# Altium PCB PCB.PcbDoc
Units mm, origin at the board's own origin, x right, y up, seen from the top; angles counter-clockwise.
Board outline 47.88 x 20.83 mm, 2 copper layers (Top Layer, Bottom Layer); 23 components, 11 nets, 65 pads, 4 vias.
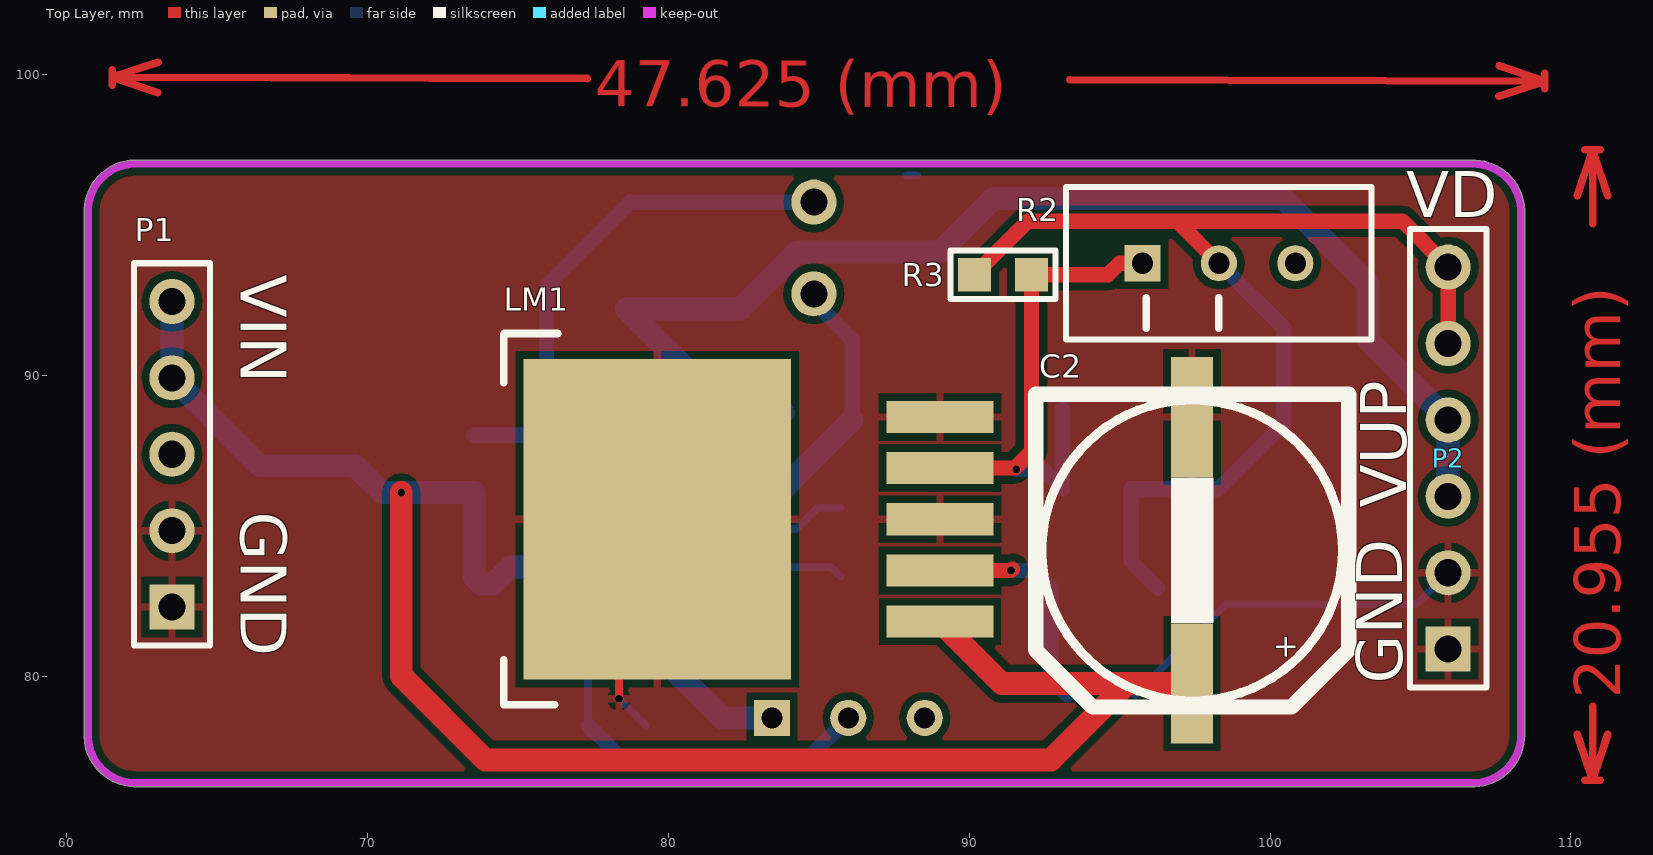
[diagram p0: Top Layer view]
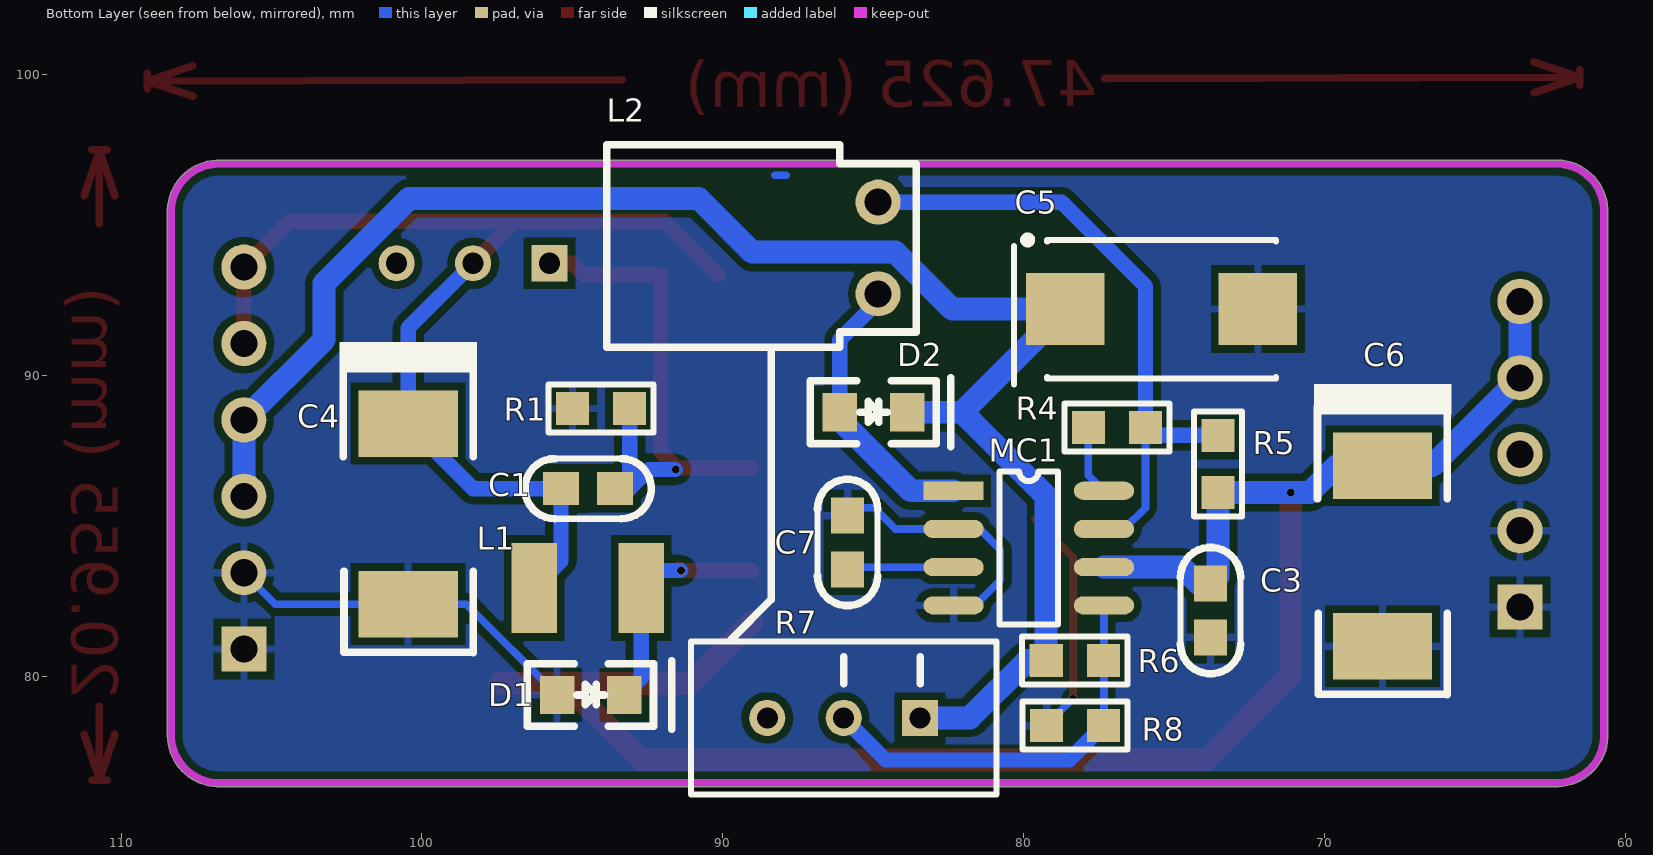
[diagram p1: Bottom Layer view, seen from below]

## Layer stack, top to bottom
Top Layer: signal copper 0.0356
Dielectric: dielectric 0.32, FR-4, Dk 4.8
Bottom Layer: signal copper 0.0356

## Board outline
60.579,77.978 60.579,95.374 cw(c62.293,95.441) 62.225,97.155 cw(c62.23,97.028) 62.23,97.155 106.677,97.155 cw(c106.743,95.441) 108.458,95.509 cw(c108.331,95.504) 108.458,95.504 108.458,78.108 cw(c106.743,78.041) 108.46,78.041 cw(c106.743,78.041) 106.812,76.327 cw(c106.807,76.454) 106.807,76.327 62.36,76.327 cw(c62.293,78.041) 60.579,77.973 cw(c60.706,77.978)

## Design rules (kind name [scope] priority, off if disabled: settings)
Clearance [All] p1: gap=0.254
PolygonConnect [All] p1: connectstyle=Relief reliefconductorwidth=0.254 reliefentries=4 polygonreliefangle="90 Angle" airgapwidth=0.254
RoutingVias [All] p1: holewidth=0.711 width=1.27 viastyle="Through Hole" minholewidth=0.711 minwidth=1.27 maxholewidth=0.711 maxwidth=1.27
SolderMaskExpansion [All] p1: expansion=0.102
Width [All] p1: maxlimit=1.27 minlimit=0.254 preferedwidth=0.254 minimp=50.000000 maximp=50.000000 favimp=50.000000
28 further rules are at their usual default settings.

## Components (designator, comment, footprint, x,y, rotation, side; value= is the part's Value field where it differs from the comment)
C1 "Cap" CAP-MLCC-0603 95.377,86.233 r0 bottom
C2 "Cap Pol3" SMD-EC-F10 97.409,79.756 r90 top
C3 "Cap" CAP-MLCC-0603 73.787,81.28 r270 bottom
C4 "Cap Pol3" 6032C 100.457,88.392 r90 bottom
C5 "Cap Pol" CAP-TAN-7343/CAPD 78.613,92.202 r180 bottom
C6 "Cap Pol" 6032C 68.072,86.995 r90 bottom
C7 "Cap" CAP-MLCC-0603 85.852,85.344 r90 bottom
D1 "1N5819" 0805D 95.504,79.375 r180 bottom
D2 "1N5819" 0805D 86.106,88.773 r180 bottom
L1 "Inductor" SMDL52 94.615,82.931 r0 bottom
L2 "Inductor" "HEADER2 PZ" 84.709,94.234 r90 bottom
LM1 "LM2596" TO-263-5 84.328,85.217 r90 top
MC1 "MC34063" LT1963-SOP8 81.661,78.105 r180 bottom
P1 "Header 5" HDR1X5 63.5,82.296 r90 top
P2 "Header 6" HDR1X6 105.918,80.899 r90 top
R1 "Res1" RES-0603 94.996,88.9 r0 bottom
R2 "RPot" VR5 98.298,93.726 r0 top
R3 "Res1" RES-0603 90.17,93.345 r180 top
R4 "Res1" RES-0603 75.946,88.265 r180 bottom
R5 "Res1" RES-0603 73.533,86.106 r270 bottom
R6 "Res1" RES-0603 79.248,80.518 r0 bottom
R7 "RPot" VR5 85.979,78.613 r0 bottom
R8 "Res1" RES-0603 77.343,78.359 r180 bottom

## Footprints (in the part's own frame and the unit in brackets; to place one, negate y for a bottom-side part, rotate by r counter-clockwise, add the part's x,y. Pads: shape width x height; smd on the part's side, far side on the other; paste and mask are expansions set on the pad)
0805D [mil]
  rect 45x50 smd: A(0,0) K(88,0)
  silkscreen extent -39,-41 126,41
6032C [mm]
  rect 2.2x3.3 smd: 1(0,0) 2(-6,0)
  silkscreen extent -7.6,-2.29 2.72,2.28
CAP-MLCC-0603 [mm]
  rect 1.2x1.1 smd: 1(0,0) 2(-1.8,0)
  silkscreen extent -3,-1 1.2,1, body extent -1.77,-0.47 -0.02,0.48, height 0.85
CAP-TAN-7343/CAPD [mm]
  rect 2.6x2.4 smd: 1(0,0) 2(6.4,0)
  silkscreen extent -1.7,-2.5 7,2.42
HDR1X5 [mm] "Connector; Header; 5 Position"
  rect 1.5x1.5 hole 0.9: 1(0,0)
  round 1.5 hole 0.9: 2(2.54,0) 3(5.08,0) 4(7.62,0) 5(10.16,0)
  silkscreen extent -1.27,-1.27 11.43,1.27
HDR1X6 [mm] "Connector; Header; 5 Position"
  rect 1.5x1.5 hole 0.9: 1(0,0)
  round 1.5 hole 0.9: 2(2.54,0) 3(5.08,0) 4(7.62,0) 5(10.16,0) 6(12.7,0)
  silkscreen extent -1.27,-1.27 13.97,1.27
"HEADER2 PZ" [mm]
  round 1.5 hole 0.9: 1(-1.524,0.127) 2(1.524,0.127)
  silkscreen extent -3.3,-1.14 3.43,9.14
LT1963-SOP8 [mm]
  rect 2x0.6 smd: 1(-0.667,8.059)
  oval 2x0.6 smd: 2(-0.667,6.789) 3(-0.667,5.519) 4(-0.667,4.249) 5(4.333,4.249) 6(4.333,5.519) 7(4.333,6.789) 8(4.333,8.059)
  silkscreen extent 0.87,3.61 2.8,8.69
RES-0603 [mm]
  rect 1.1x1.1 smd: 1(0,0) 2(-1.9,0)
  silkscreen extent -2.7,-0.8 0.8,0.8, body extent -1.8,-0.47 -0.1,0.48, height 0.6
SMD-EC-F10 [mm]
  rect 4x1.4 smd: 1(0,0) 2(8.86,0)
  silkscreen extent -0.78,-5.2 9.62,5.2
SMDL52 [mm]
  rect 1.5x3 smd: 1(-1.905,0) 2(1.651,0)
TO-263-5 [mil]
  rect 42x140 smd: 1(-134,-185) 2(-67,-185) 3(0,-185) 4(67,-185) 5(134,-185)
  rect 420x350 smd: 3(0,185)
  silkscreen extent -243,315 243,386
VR5 [mm] "Variable Resistor, Thru-Hole; 3 Leads"
  rect 1.2x1.2 hole 0.7: 1(-2.54,0)
  round 1.2 hole 0.7: 2(0,0) 3(2.54,0)
  silkscreen extent -5.08,-2.54 5.08,2.54

## Part data
C1 C3 C7: "Capacitor"
C2 C4: "Polarized Capacitor (Surface Mount)"
C5 C6: "Polarized Capacitor (Radial)"
D1 D2: library part D-MBRA140T3, "MBRA140T3"
LM1: "12-5"
P1: "Header, 5-Pin"
P2: "Header, 6-Pin"
R1 R3 R4 R5 R6 R8: "Resistor"
R2 R7: "Potentiometer"

## Via types
v1: diameter 0.254, hole 0.254, Top Layer to Bottom Layer, 4 vias

## Nets (pads, with @x,y where several pads share a name; then routed paths per layer and width w, separated by ;. In a path a pad name is that pad's centre, name@x,y a point inside that pad or via, vN(x,y) a via of type N, cw(c..) or ccw(c..) an arc to the next point about the centre after c; other vN are vias at no path point)
GND: C2.2 C3.1 C4.2 C5.2 C6.2 C7.1 D1.A LM1.3 LM1.5 MC1.2 MC1.4 P1.1 P1.2 P2.1 P2.2 R1.1 R8.2 | length 28.3
  Top Layer w0.254: v1(78.359,79.248) 78.359,83.947 LM1.3@79.629,85.217
  Bottom Layer w0.254: v1(78.359,79.248) 79.243,78.364 R8.2 ; MC1.4 81.603,82.354 80.772,83.185 80.772,84.201 81.465,84.894 MC1.2 84.259,84.894 84.963,85.598 C7.1@85.725,85.598 ; D1.A 98.521,82.392 C4.2 104.871,82.392 P2.2
NetC1_2: C1.2 LM1.4 R1.2 R2.1 R3.2 | length 17.4
  Top Layer w0.508: LM1.4 91.516,86.919 92.07,87.473 R3.2 94.615,93.345 94.996,93.726 R2.1
  Bottom Layer w0.508: v1(91.567,86.868) 92.456,86.868 93.091,86.233 93.091,88.895 R1.2
NetC7_2: C7.2 MC1.3 | length 3.5
  Bottom Layer w0.254: MC1.3 85.413,83.624 C7.2@85.725,83.312
NetD1_K: D1.K L1.1 LM1.2 | length 7.8
  Top Layer w0.508: LM1.2 v1(91.389,83.515) v1@91.44,83.566
  Bottom Layer w0.508: v1(91.389,83.515) 92.126,83.515 L1.1 92.71,79.934 D1.K
NetD2_A: D2.A L2.1 MC1.1 | length 9.5
  Bottom Layer w0.508: L2.1 84.836,92.456 86.106,91.186 D2.A@86.106,88.519
  Bottom Layer w0.762: MC1.1 83.751,86.164 D2.A@86.106,88.519
NetL2_2: L2.2 MC1.7 R4.1 R5.2 | length 21.6
  Bottom Layer w0.254: R4.1@75.687,88.006 R4.1 75.946,85.598 76.65,84.894 MC1.7
  Bottom Layer w0.508: R5.2 R4.1@75.687,88.006 ; R4.1 75.946,92.964 78.74,95.758 L2.2
NetMC1_5: MC1.5 R6.2 R7.2 R8.1 | length 13.9
  Bottom Layer w0.254: MC1.5 77.328,78.12 R8.1@77.343,78.105
  Bottom Layer w0.508: R8.1 78.486,77.216 84.582,77.216 R7.2
NetMC1_8: MC1.8 R4.2 | length 2.3
  Bottom Layer w0.254: MC1.8 77.846,86.682 R4.2
VDOWN: C1.1 C4.1 L1.2 P2.5 P2.6 R2.2 R3.1 | length 37.5
  Top Layer w0.508: R3.1 91.948,95.123 96.901,95.123 ; R2.2 96.901,95.123 ; P2.5 P2.6 104.394,95.123 96.901,95.123
  Bottom Layer w0.508: L1.2 95.377,83.82 C1.1 98.298,86.233 C4.1 100.457,91.567 R2.2
VIN: C2.1 C3.2 C6.1 LM1.1 MC1.6 P1.4 P1.5 R5.1 | length 62.7
  Top Layer w0.762: v1(71.12,86.106) 71.12,80.01 73.914,77.216 92.71,77.216 95.25,79.756 ; LM1.1 91.084,79.756 95.25,79.756 ; C2.1 95.25,79.756
  Bottom Layer w0.762: P1.5 P1.4 66.421,86.995 C6.1 69.596,86.995 70.485,86.106 v1(71.12,86.106) R5.1 73.533,83.312 73.787,83.058 74.168,83.058 74.734,83.624 MC1.6
VUP: C5.1 D2.K P2.3 P2.4 R6.1 R7.1 | length 56.5
  Bottom Layer w0.762: R7.1 81.788,78.613 79.883,80.518 R6.1 79.248,85.979 82.042,88.773 ; D2.K@83.82,88.773 82.042,88.773 ; P2.3 P2.4 103.251,91.186 103.251,93.06 100.426,95.885 90.805,95.885 89.015,94.095 84.262,94.095 82.369,92.202 C5.1 82.042,88.773
pads on no net: P1.3 R2.3 R7.3
copper on no net: | length 51.7
  Top Layer w0.254: 61.508,99.653 61.509,100.161 ; 63.031,99.395 61.509,99.907 ; 63.034,100.411 61.509,99.907 ; 77.297,99.865 61.509,99.907 ; 93.345,99.822 109.134,99.78 ; 107.608,99.276 109.134,99.78 ; 107.611,100.292 109.134,99.78 ; 109.133,99.526 109.134,100.034 ; 110.211,78.064 110.719,76.54 ; 110.211,95.971 110.719,97.495 ; 110.465,76.54 110.973,76.54 ; 110.465,97.495 110.973,97.495 ; 110.719,78.994 110.719,76.54 ; 110.719,95.042 110.719,97.495 ; 111.227,78.064 110.719,76.54 ; 111.227,95.971 110.719,97.495
  Bottom Layer w0.254: 87.884,96.647 88.265,96.647

## Polygon pours and split planes (outlines as drawn)
GND on Bottom Layer "Bottom Layer-No Net" (solid, remove dead copper, pour order 4): 109.632,99.244 108.108,97.72 53.244,97.72 53.244,77.273 56.292,74.225 56.419,74.098 109.378,74.098
GND on Top Layer "Bottom Layer-No Net" (solid, remove dead copper, pour order 6): 111.621,102.374 111.621,73.672 109.843,71.894 108.319,73.418 44.311,73.418 44.311,97.675 47.994,101.358

## Keep-outs
Keep-Out Layer:
  lines w0.254: 60.706,95.377 cw(c62.293,95.441) 62.23,97.028 106.68,97.028 cw(c106.743,95.441) 108.331,95.504 108.331,77.978 ; 60.706,95.504 60.706,77.978 ccw(c62.293,78.041) 62.357,76.454 106.807,76.454 ccw(c106.743,78.041) 108.331,78.105

## Other copper
Top Layer:
  text "47.625 (mm)" at 77.549,98.95 h1.52 r359.85
  text "20.955 (mm)" at 111.633,79.248 h1.52 r90

## Silkscreen, mask and mechanical layers (free items; w line width, h text height)
Top Overlay:
  lines w0.254: 95.885,91.567 95.885,92.583 ; 98.298,91.567 98.298,92.583
  text "VD" at 104.521,95.25 h1.52
  text "VIN" at 65.786,93.345 h1.52 r270
  text "VUP" at 104.521,85.598 h1.52 r90
  text "GND" at 65.786,85.471 h1.52 r270
  text "GND" at 104.394,79.756 h1.52 r90
Bottom Overlay:
  lines w0.254: 82.423,87.63 82.423,89.916 ; 83.439,79.756 83.439,80.645 ; 85.979,79.756 85.979,80.645 ; 88.392,90.932 88.392,82.55 89.725,81.216 ; 91.694,78.232 91.694,80.518

## Text inside footprints (layer, text, board x,y; h text height)
C2: Top Overlay "+" at 100.849,80.536 h0.76 r90